# EAGLE board probe20mm (EAGLE 9.6.2)
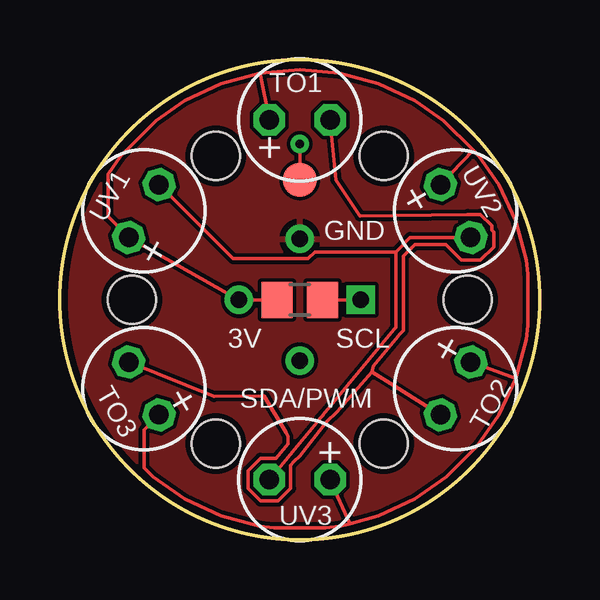
[diagram p0: board, top side]
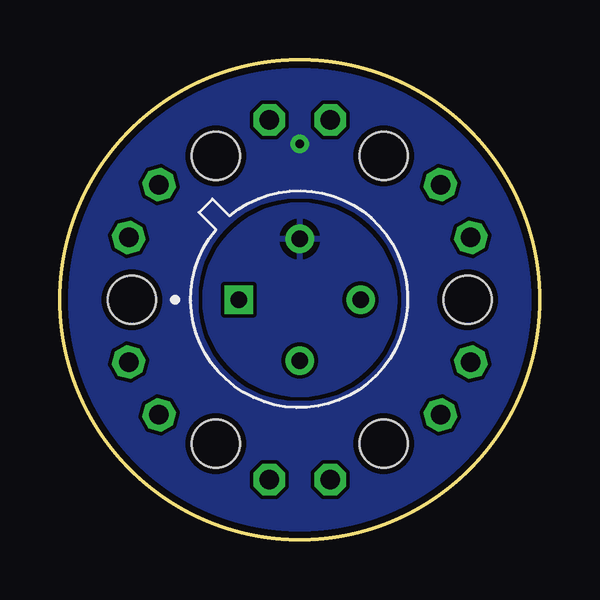
[diagram p1: board, bottom side, seen from below]

Size 20 x 20 mm. Coordinates in mm from the lower left corner, seen from the top.
Outline: circle at 10,10 radius 10
Copper layers (1*16): Top 0.035mm / dielectric 1.5mm / Bottom 0.035mm
Design rules "default *": minimum track width 6mil, minimum drill 0.35mm, track to track 6mil, track to pad 6mil, pad to pad 6mil, via to via 6mil, smd to smd 6mil, copper to edge 10mil, drill to drill 6mil, minimum pad ring 10mil, minimum via ring 8mil, stop-mask expansion 4mil, vias tented up to drill 0mil, thermal gap 10mil
Holes 2 mm at 6.5,16 3,10 6.5,4 13.5,4 17,10 13.5,16

## Footprints (pad centres in the part's own frame; a part is rotated, then mirrored left to right if it is on the bottom)
TP14R = smd 1.4 x 1.4: TP 0,0
R0805 = smd 1.3 x 1.5: 1 -0.95,0; 2 0.95,0
LED5MM = drill 0.813 octagon: A -1.27,0; K 1.27,0
TO254P942H425-4 = drill 0.69 pad 1.09 square: 1 -2.54,0 | drill 0.69 pad 1.09: 2 0,-2.54; 3 2.54,0; 4 0,2.54

## Placement (x,y rotation side)
FACE  TPTP14R  [TP14R]  10,15 0 top
R1  10k  [R0805]  10,10 180 top
TO1  [LED5MM]  10,17.5 0 top
TO2  [LED5MM]  16.5,6.3 240 top
TO3  [LED5MM]  3.5,6.3 120 top
U1  MLX90614ESF-BAA-000-TU  [TO254P942H425-4]  10,10 0 bottom
UV1  [LED5MM]  3.5,13.7 60 top
UV2  [LED5MM]  16.5,13.7 300 top
UV3  [LED5MM]  10,2.5 180 top

## Library data of the parts
FACE = testpad
R1 = resistor
TO1-TO3 UV1-UV3 = general
U1 = MLX90614ESF-BAA-000-TU; AVAILABILITY: Bad; DESCRIPTION: Temperature Sensor Digital, Infrared (IR) -40°C ~ 85°C 16 b TO-39; MF: Melexis; MP: MLX90614ESF-BAA-000-TU; PACKAGE: TO-39 Melexis; PRICE: None; PURCHASE-URL: https://pricing.snapeda.com/search/part/MLX90614ESF-BAA-000-TU/?ref=eda

## Nets
3V: R1.2 TO1.A TO2.A TO3.A U1.3 UV1.A UV2.A UV3.A
FACE: FACE.TP
GND: U1.4
N$2: TO1.K TO2.K TO3.K
N$4: UV1.K UV2.K UV3.K
SCL: R1.1 U1.1

## Tracks (layer width: path | path; a pad name or v marks a point on that pad's centre or on a via)
3V
  Top 0.152: 8.33,19.45 6.72,19.02 5.2,18.31 4.02,17.48 2.52,15.98 2,15.24 2,13.46 UV1.A U1.3 R1.2 | 8.33,19.45 10,19.59 11.67,19.45 13.28,19.02 14.8,18.31 15.98,17.48 17.23,16.23 | 19.02,6.72 19.45,8.33 19.5,8.93 19.5,11.07 19.45,11.67 19.02,13.28 18.31,14.8 17.48,15.98 17.23,16.23 | 19.02,6.72 18.31,5.2 17.39,3.89 16.11,2.61 14.8,1.69 13.28,0.98 12.09,0.67 | 12.09,0.67 11.67,0.55 11.07,0.5 8.93,0.5 8.33,0.55 6.72,0.98 5.2,1.69 3.89,2.61 3.5,3 3.5,4.57 TO3.A | TO1.A 8.33,19.45 | UV2.A 17.23,16.23 | TO2.A 19.02,6.72 | UV3.A 12.09,0.67
FACE  (via drill 0.35)
  Top 0.152: FACE.TP v10,16.5
  pour Bottom (rank 5): -1,-1 -1,21 21,21 21,-1
GND
  pour Top: 0,0 0,20 20,20 20,0
  pour Bottom: 6,10 arc-90 10,14 arc-90 14,10 arc-90 10,6 arc-90
N$2
  Top 0.152: TO3.K 6.42,5.96 8.5,6 9.42,4.46 9.5,4.3 9.5,4 9,3.39 8.36,3.39 7.84,2.87 7.84,2.13 8.36,1.61 9.1,1.61 9.62,2.13 9.62,3.09 9.75,3.25 10,3.5 11.12,4.9 11.55,5.33 13,7 | 13,7 13.94,6.41 TO2.K | 13,7 13.07,7.24 14.1,8.47 14.17,8.55 14.32,8.71 14.32,11.82 14.79,12.29 16.09,12.29 16.74,11.65 17.53,11.65 18.09,12.21 18.09,12.82 18,12.91 18,13.08 17.53,13.55 17,13.55 12.5,13.5 11.5,15 TO1.K
N$4
  Top 0.152: UV3.K 9.99,4.01 10.82,5.01 10.82,5.03 10.89,5.1 10.96,5.19 10.97,5.19 13.94,8.76 | 13.94,8.76 | 13.94,8.76 14,8.84 14,12 | 14,12 14.6,12.6 UV2.K | 14,12 10.63,12 10.34,11.71 7.22,11.71 UV1.K
SCL
  Top 0.152: R1.1 U1.1

## Text on the board
tPlace: GND | 3V | SCL | SDA/PWM